# Altium PCB POETIC_AD_Input_V2_Panel.PcbDoc
Units mm, origin at the board's own origin, x right, y up, seen from the top; angles counter-clockwise.
Board outline 420 x 220 mm, 2 copper layers (Top Layer, Bottom Layer); 4 components, 0 nets, 4 pads, 0 vias.
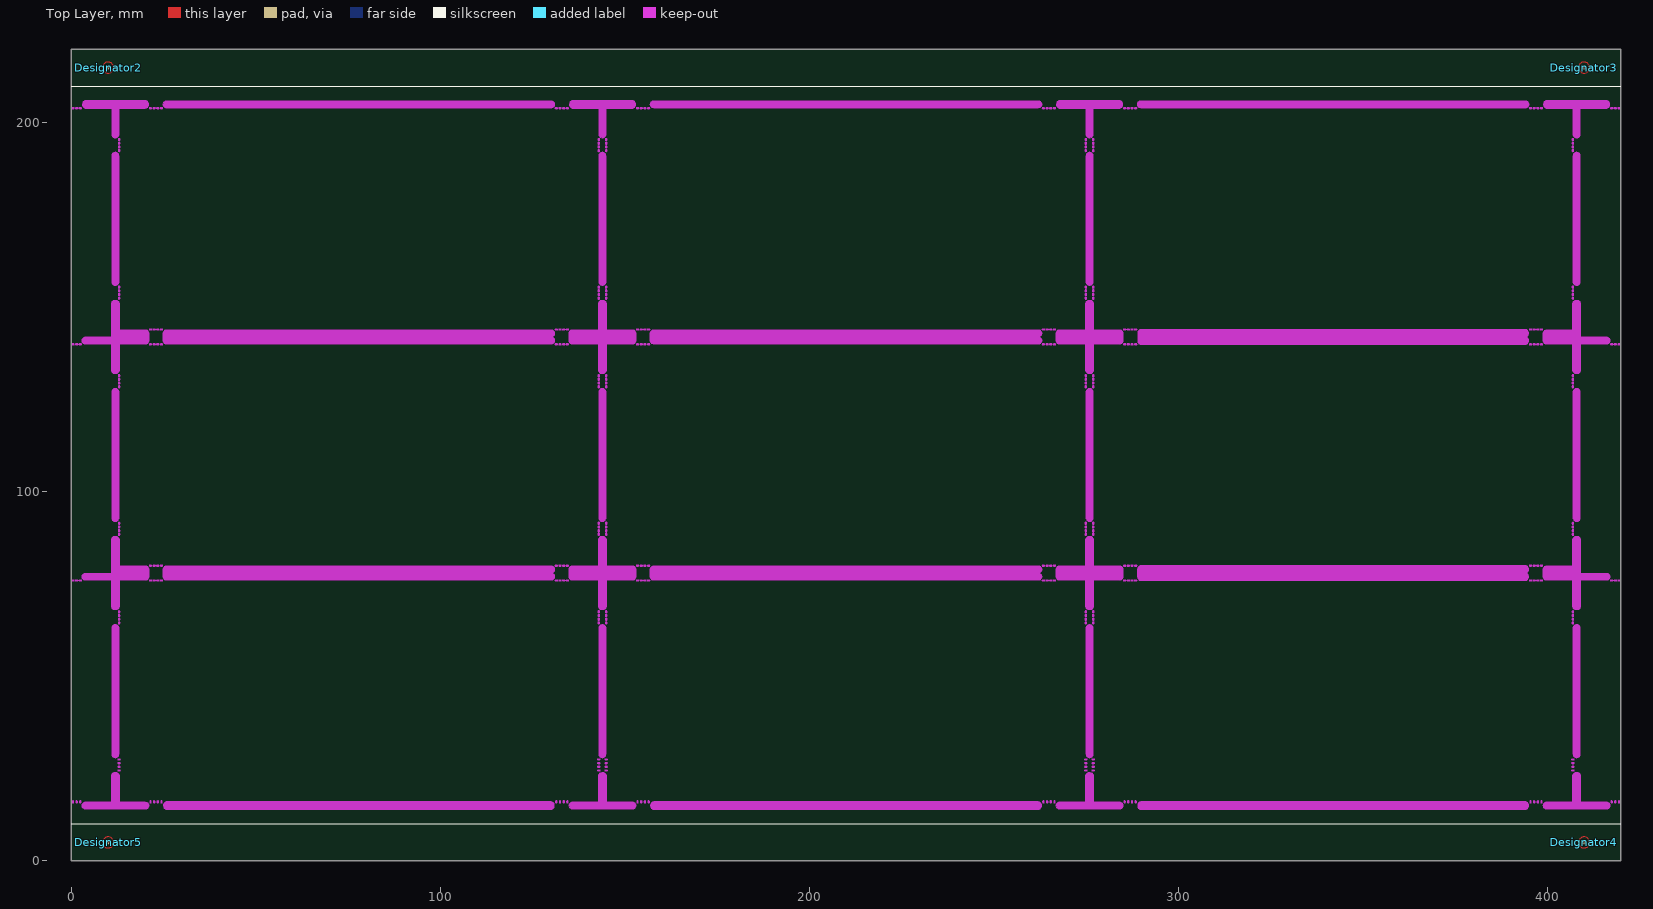
[diagram p0: Top Layer view]
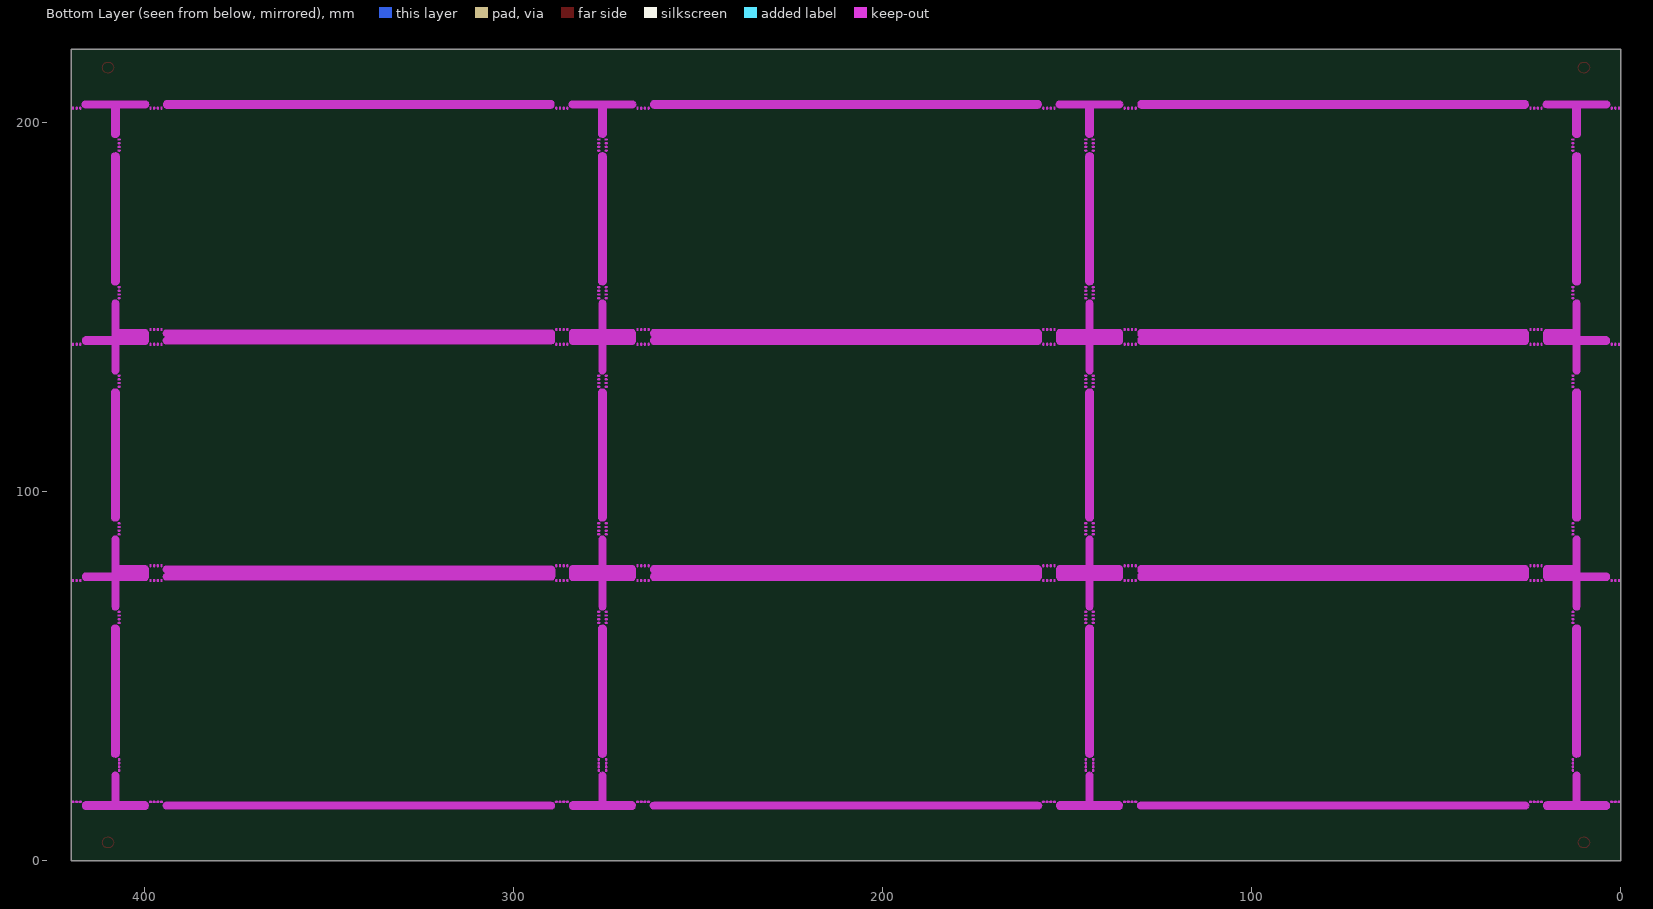
[diagram p1: Bottom Layer view, seen from below]

## Layer stack, top to bottom
Top Solder: solder mask 0.0102, Solder Resist, Dk 3.5
Top Layer: signal copper 0.0356
Dielectric 1: dielectric 0.32, FR-4, Dk 4.8
Bottom Layer: signal copper 0.0356
Bottom Solder: solder mask 0.0102, Solder Resist, Dk 3.5

## Board outline
0,0 0,220 420,220 420,0
cut-out: 4,16 10.999,16 10.999,23 cw(c12,23) 13,23 13,16 20,16 cw(c20,15) 21,15 cw(c20,15) 20,13.999 4,13.999 cw(c4,15)
cut-out: 0.5,16.25 ccw(c0.5,16) 0.5,15.749 ccw(c0.5,16) 0.75,16 ccw(c0.5,16)
cut-out: 1.5,16.25 ccw(c1.5,16) 1.5,15.749 ccw(c1.5,16) 1.75,16 ccw(c1.5,16)
cut-out: 2.5,16.25 ccw(c2.5,16) 2.5,15.749 ccw(c2.5,16) 2.75,16 ccw(c2.5,16)
cut-out: 21.5,16.25 ccw(c21.5,16) 21.5,15.749 ccw(c21.5,16) 21.75,16 ccw(c21.5,16)
cut-out: 22.5,16.25 ccw(c22.5,16) 22.5,15.749 ccw(c22.5,16) 22.75,16 ccw(c22.5,16)
cut-out: 23.5,16.25 ccw(c23.5,16) 23.5,15.749 ccw(c23.5,16) 23.75,16 ccw(c23.5,16)
cut-out: 24.5,16.25 ccw(c24.5,16) 24.5,15.749 ccw(c24.5,16) 24.75,16 ccw(c24.5,16)
cut-out: 26,16 ccw(c26,15) 26,13.999 130,13.999 ccw(c130,15) 131,15 ccw(c130,15) 130,16
cut-out: 131.5,16.25 ccw(c131.5,16) 131.5,15.749 ccw(c131.5,16) 131.75,16 ccw(c131.5,16)
cut-out: 132.5,16.25 ccw(c132.5,16) 132.5,15.749 ccw(c132.5,16) 132.75,16 ccw(c132.5,16)
cut-out: 133.5,16.25 ccw(c133.5,16) 133.5,15.749 ccw(c133.5,16) 133.75,16 ccw(c133.5,16)
cut-out: 134.5,16.25 ccw(c134.5,16) 134.5,15.749 ccw(c134.5,16) 134.75,16 ccw(c134.5,16)
cut-out: 136,16 142.999,16 142.999,23 cw(c144,23) 145,23 145,16 152,16 cw(c152,15) 153,15 cw(c152,15) 152,13.999 136,13.999 cw(c136,15)
cut-out: 153.5,16.25 ccw(c153.5,16) 153.5,15.749 ccw(c153.5,16) 153.75,16 ccw(c153.5,16)
cut-out: 154.5,16.25 ccw(c154.5,16) 154.5,15.749 ccw(c154.5,16) 154.75,16 ccw(c154.5,16)
cut-out: 155.5,16.25 ccw(c155.5,16) 155.5,15.749 ccw(c155.5,16) 155.75,16 ccw(c155.5,16)
cut-out: 156.5,16.25 ccw(c156.5,16) 156.5,15.749 ccw(c156.5,16) 156.75,16 ccw(c156.5,16)
cut-out: 158,16 ccw(c158,15) 158,13.999 262,13.999 ccw(c262,15) 263,15 ccw(c262,15) 262,16
cut-out: 263.5,16.25 ccw(c263.5,16) 263.5,15.749 ccw(c263.5,16) 263.75,16 ccw(c263.5,16)
cut-out: 264.5,16.25 ccw(c264.5,16) 264.5,15.749 ccw(c264.5,16) 264.75,16 ccw(c264.5,16)
cut-out: 265.5,16.25 ccw(c265.5,16) 265.5,15.749 ccw(c265.5,16) 265.75,16 ccw(c265.5,16)
cut-out: 266.5,16.25 ccw(c266.5,16) 266.5,15.749 ccw(c266.5,16) 266.75,16 ccw(c266.5,16)
cut-out: 268,16 274.999,16 274.999,23 cw(c276,23) 277,23 277,16 284,16 cw(c284,15) 285,15 cw(c284,15) 284,13.999 268,13.999 cw(c268,15)
cut-out: 285.5,16.25 ccw(c285.5,16) 285.5,15.749 ccw(c285.5,16) 285.75,16 ccw(c285.5,16)
cut-out: 286.5,16.25 ccw(c286.5,16) 286.5,15.749 ccw(c286.5,16) 286.75,16 ccw(c286.5,16)
cut-out: 287.5,16.25 ccw(c287.5,16) 287.5,15.749 ccw(c287.5,16) 287.75,16 ccw(c287.5,16)
cut-out: 288.5,16.25 ccw(c288.5,16) 288.5,15.749 ccw(c288.5,16) 288.75,16 ccw(c288.5,16)
cut-out: 290,16 ccw(c290,15) 290,13.999 394,13.999 ccw(c394,15) 395,15 ccw(c394,15) 394,16
cut-out: 395.5,16.25 ccw(c395.5,16) 395.5,15.749 ccw(c395.5,16) 395.75,16 ccw(c395.5,16)
cut-out: 396.5,16.25 ccw(c396.5,16) 396.5,15.749 ccw(c396.5,16) 396.75,16 ccw(c396.5,16)
cut-out: 397.5,16.25 ccw(c397.5,16) 397.5,15.749 ccw(c397.5,16) 397.75,16 ccw(c397.5,16)
cut-out: 398.5,16.25 ccw(c398.5,16) 398.5,15.749 ccw(c398.5,16) 398.75,16 ccw(c398.5,16)
cut-out: 400,16 406.999,16 406.999,23 cw(c408,23) 409,23 409,16 416,16 cw(c416,15) 417,15 cw(c416,15) 416,13.999 400,13.999 cw(c400,15)
cut-out: 417.5,16.25 ccw(c417.5,16) 417.5,15.749 ccw(c417.5,16) 417.75,16 ccw(c417.5,16)
cut-out: 418.5,16.25 ccw(c418.5,16) 418.5,15.749 ccw(c418.5,16) 418.75,16 ccw(c418.5,16)
cut-out: 419.5,16.25 ccw(c419.5,16) 419.5,15.749 ccw(c419.5,16) 419.75,16 ccw(c419.5,16)
cut-out: 12.749,24.5 cw(c13,24.5) 13.25,24.5 cw(c13,24.5)
cut-out: 12.749,25.5 cw(c13,25.5) 13.25,25.5 cw(c13,25.5)
cut-out: 12.749,26.5 cw(c13,26.5) 13.25,26.5 cw(c13,26.5)
cut-out: 12.749,27.5 cw(c13,27.5) 13.25,27.5 cw(c13,27.5)
cut-out: 142.749,24.5 cw(c143,24.5) 143.25,24.5 cw(c143,24.5)
cut-out: 142.749,25.5 cw(c143,25.5) 143.25,25.5 cw(c143,25.5)
cut-out: 142.749,26.5 cw(c143,26.5) 143.25,26.5 cw(c143,26.5)
cut-out: 142.749,27.5 cw(c143,27.5) 143.25,27.5 cw(c143,27.5)
cut-out: 144.749,24.5 cw(c145,24.5) 145.25,24.5 cw(c145,24.5)
cut-out: 144.749,25.5 cw(c145,25.5) 145.25,25.5 cw(c145,25.5)
cut-out: 144.749,26.5 cw(c145,26.5) 145.25,26.5 cw(c145,26.5)
cut-out: 144.749,27.5 cw(c145,27.5) 145.25,27.5 cw(c145,27.5)
cut-out: 274.749,24.5 cw(c275,24.5) 275.25,24.5 cw(c275,24.5)
cut-out: 274.749,25.5 cw(c275,25.5) 275.25,25.5 cw(c275,25.5)
cut-out: 274.749,26.5 cw(c275,26.5) 275.25,26.5 cw(c275,26.5)
cut-out: 274.749,27.5 cw(c275,27.5) 275.25,27.5 cw(c275,27.5)
cut-out: 276.749,24.5 cw(c277,24.5) 277.25,24.5 cw(c277,24.5)
cut-out: 276.749,25.5 cw(c277,25.5) 277.25,25.5 cw(c277,25.5)
cut-out: 276.749,26.5 cw(c277,26.5) 277.25,26.5 cw(c277,26.5)
cut-out: 276.749,27.5 cw(c277,27.5) 277.25,27.5 cw(c277,27.5)
cut-out: 406.749,24.5 cw(c407,24.5) 407.25,24.5 cw(c407,24.5)
cut-out: 406.749,25.5 cw(c407,25.5) 407.25,25.5 cw(c407,25.5)
cut-out: 406.749,26.5 cw(c407,26.5) 407.25,26.5 cw(c407,26.5)
cut-out: 406.749,27.5 cw(c407,27.5) 407.25,27.5 cw(c407,27.5)
cut-out: 12.749,91.5 ccw(c13,91.5) 13.25,91.5 ccw(c13,91.5)
cut-out: 12.749,90.5 ccw(c13,90.5) 13.25,90.5 ccw(c13,90.5)
cut-out: 12.749,89.5 ccw(c13,89.5) 13.25,89.5 ccw(c13,89.5)
cut-out: 12.749,88.5 ccw(c13,88.5) 13.25,88.5 ccw(c13,88.5)
cut-out: 21.5,79.749 cw(c21.5,80) 21.5,80.25 cw(c21.5,80) 21.75,80 cw(c21.5,80)
cut-out: 22.5,79.749 cw(c22.5,80) 22.5,80.25 cw(c22.5,80) 22.75,80 cw(c22.5,80)
cut-out: 23.5,79.749 cw(c23.5,80) 23.5,80.25 cw(c23.5,80) 23.75,80 cw(c23.5,80)
cut-out: 24.5,79.749 cw(c24.5,80) 24.5,80.25 cw(c24.5,80) 24.75,80 cw(c24.5,80)
cut-out: 142.749,91.5 ccw(c143,91.5) 143.25,91.5 ccw(c143,91.5)
cut-out: 142.749,90.5 ccw(c143,90.5) 143.25,90.5 ccw(c143,90.5)
cut-out: 142.749,89.5 ccw(c143,89.5) 143.25,89.5 ccw(c143,89.5)
cut-out: 142.749,88.5 ccw(c143,88.5) 143.25,88.5 ccw(c143,88.5)
cut-out: 144.749,91.5 ccw(c145,91.5) 145.25,91.5 ccw(c145,91.5)
cut-out: 144.749,90.5 ccw(c145,90.5) 145.25,90.5 ccw(c145,90.5)
cut-out: 144.749,89.5 ccw(c145,89.5) 145.25,89.5 ccw(c145,89.5)
cut-out: 144.749,88.5 ccw(c145,88.5) 145.25,88.5 ccw(c145,88.5)
cut-out: 134.5,79.749 cw(c134.5,80) 134.5,80.25 cw(c134.5,80) 134.75,80 cw(c134.5,80)
cut-out: 133.5,79.749 cw(c133.5,80) 133.5,80.25 cw(c133.5,80) 133.75,80 cw(c133.5,80)
cut-out: 132.5,79.749 cw(c132.5,80) 132.5,80.25 cw(c132.5,80) 132.75,80 cw(c132.5,80)
cut-out: 131.5,79.749 cw(c131.5,80) 131.5,80.25 cw(c131.5,80) 131.75,80 cw(c131.5,80)
cut-out: 153.5,79.749 cw(c153.5,80) 153.5,80.25 cw(c153.5,80) 153.75,80 cw(c153.5,80)
cut-out: 154.5,79.749 cw(c154.5,80) 154.5,80.25 cw(c154.5,80) 154.75,80 cw(c154.5,80)
cut-out: 155.5,79.749 cw(c155.5,80) 155.5,80.25 cw(c155.5,80) 155.75,80 cw(c155.5,80)
cut-out: 156.5,79.749 cw(c156.5,80) 156.5,80.25 cw(c156.5,80) 156.75,80 cw(c156.5,80)
cut-out: 263.5,79.749 cw(c263.5,80) 263.5,80.25 cw(c263.5,80) 263.75,80 cw(c263.5,80)
cut-out: 264.5,79.749 cw(c264.5,80) 264.5,80.25 cw(c264.5,80) 264.75,80 cw(c264.5,80)
cut-out: 265.5,79.749 cw(c265.5,80) 265.5,80.25 cw(c265.5,80) 265.75,80 cw(c265.5,80)
cut-out: 266.5,79.749 cw(c266.5,80) 266.5,80.25 cw(c266.5,80) 266.75,80 cw(c266.5,80)
cut-out: 274.749,91.5 ccw(c275,91.5) 275.25,91.5 ccw(c275,91.5)
cut-out: 274.749,90.5 ccw(c275,90.5) 275.25,90.5 ccw(c275,90.5)
cut-out: 274.749,89.5 ccw(c275,89.5) 275.25,89.5 ccw(c275,89.5)
cut-out: 274.749,88.5 ccw(c275,88.5) 275.25,88.5 ccw(c275,88.5)
cut-out: 276.749,91.5 ccw(c277,91.5) 277.25,91.5 ccw(c277,91.5)
cut-out: 276.749,90.5 ccw(c277,90.5) 277.25,90.5 ccw(c277,90.5)
cut-out: 276.749,89.5 ccw(c277,89.5) 277.25,89.5 ccw(c277,89.5)
cut-out: 276.749,88.5 ccw(c277,88.5) 277.25,88.5 ccw(c277,88.5)
cut-out: 285.5,79.749 cw(c285.5,80) 285.5,80.25 cw(c285.5,80) 285.75,80 cw(c285.5,80)
cut-out: 286.5,79.749 cw(c286.5,80) 286.5,80.25 cw(c286.5,80) 286.75,80 cw(c286.5,80)
cut-out: 287.5,79.749 cw(c287.5,80) 287.5,80.25 cw(c287.5,80) 287.75,80 cw(c287.5,80)
cut-out: 288.5,79.749 cw(c288.5,80) 288.5,80.25 cw(c288.5,80) 288.75,80 cw(c288.5,80)
cut-out: 406.749,91.5 ccw(c407,91.5) 407.25,91.5 ccw(c407,91.5)
cut-out: 406.749,90.5 ccw(c407,90.5) 407.25,90.5 ccw(c407,90.5)
cut-out: 406.749,89.5 ccw(c407,89.5) 407.25,89.5 ccw(c407,89.5)
cut-out: 406.749,88.5 ccw(c407,88.5) 407.25,88.5 ccw(c407,88.5)
cut-out: 398.5,79.749 cw(c398.5,80) 398.5,80.25 cw(c398.5,80) 398.75,80 cw(c398.5,80)
cut-out: 397.5,79.749 cw(c397.5,80) 397.5,80.25 cw(c397.5,80) 397.75,80 cw(c397.5,80)
cut-out: 396.5,79.749 cw(c396.5,80) 396.5,80.25 cw(c396.5,80) 396.75,80 cw(c396.5,80)
cut-out: 395.5,79.749 cw(c395.5,80) 395.5,80.25 cw(c395.5,80) 395.75,80 cw(c395.5,80)
cut-out: 406.749,64.5 ccw(c406.999,64.5) 407.25,64.5 ccw(c406.999,64.5)
cut-out: 406.749,65.5 ccw(c406.999,65.5) 407.25,65.5 ccw(c406.999,65.5)
cut-out: 406.749,66.5 ccw(c406.999,66.5) 407.25,66.5 ccw(c406.999,66.5)
cut-out: 406.749,67.5 ccw(c406.999,67.5) 407.25,67.5 ccw(c406.999,67.5)
cut-out: 276.749,64.5 ccw(c276.999,64.5) 277.25,64.5 ccw(c276.999,64.5)
cut-out: 276.749,65.5 ccw(c276.999,65.5) 277.25,65.5 ccw(c276.999,65.5)
cut-out: 276.749,66.5 ccw(c276.999,66.5) 277.25,66.5 ccw(c276.999,66.5)
cut-out: 276.749,67.5 ccw(c276.999,67.5) 277.25,67.5 ccw(c276.999,67.5)
cut-out: 274.749,64.5 ccw(c274.999,64.5) 275.25,64.5 ccw(c274.999,64.5)
cut-out: 274.749,65.5 ccw(c274.999,65.5) 275.25,65.5 ccw(c274.999,65.5)
cut-out: 274.749,66.5 ccw(c274.999,66.5) 275.25,66.5 ccw(c274.999,66.5)
cut-out: 274.749,67.5 ccw(c274.999,67.5) 275.25,67.5 ccw(c274.999,67.5)
cut-out: 144.749,64.5 ccw(c144.999,64.5) 145.25,64.5 ccw(c144.999,64.5)
cut-out: 144.749,65.5 ccw(c144.999,65.5) 145.25,65.5 ccw(c144.999,65.5)
cut-out: 144.749,66.5 ccw(c144.999,66.5) 145.25,66.5 ccw(c144.999,66.5)
cut-out: 144.749,67.5 ccw(c144.999,67.5) 145.25,67.5 ccw(c144.999,67.5)
cut-out: 142.749,64.5 ccw(c142.999,64.5) 143.25,64.5 ccw(c142.999,64.5)
cut-out: 142.749,65.5 ccw(c142.999,65.5) 143.25,65.5 ccw(c142.999,65.5)
cut-out: 142.749,66.5 ccw(c142.999,66.5) 143.25,66.5 ccw(c142.999,66.5)
cut-out: 142.749,67.5 ccw(c142.999,67.5) 143.25,67.5 ccw(c142.999,67.5)
cut-out: 12.749,64.5 ccw(c12.999,64.5) 13.25,64.5 ccw(c12.999,64.5)
cut-out: 12.749,65.5 ccw(c12.999,65.5) 13.25,65.5 ccw(c12.999,65.5)
cut-out: 12.749,66.5 ccw(c12.999,66.5) 13.25,66.5 ccw(c12.999,66.5)
cut-out: 12.749,67.5 ccw(c12.999,67.5) 13.25,67.5 ccw(c12.999,67.5)
cut-out: 419.499,75.75 cw(c419.499,76) 419.499,76.25 cw(c419.499,76) 419.75,76 cw(c419.499,76)
cut-out: 418.499,75.75 cw(c418.499,76) 418.499,76.25 cw(c418.499,76) 418.75,76 cw(c418.499,76)
cut-out: 417.499,75.75 cw(c417.499,76) 417.499,76.25 cw(c417.499,76) 417.75,76 cw(c417.499,76)
cut-out: 398.499,75.75 cw(c398.499,76) 398.499,76.25 cw(c398.499,76) 398.75,76 cw(c398.499,76)
cut-out: 397.499,75.75 cw(c397.499,76) 397.499,76.25 cw(c397.499,76) 397.75,76 cw(c397.499,76)
cut-out: 396.499,75.75 cw(c396.499,76) 396.499,76.25 cw(c396.499,76) 396.75,76 cw(c396.499,76)
cut-out: 395.499,75.75 cw(c395.499,76) 395.499,76.25 cw(c395.499,76) 395.75,76 cw(c395.499,76)
cut-out: 288.499,75.75 cw(c288.499,76) 288.499,76.25 cw(c288.499,76) 288.75,76 cw(c288.499,76)
cut-out: 287.499,75.75 cw(c287.499,76) 287.499,76.25 cw(c287.499,76) 287.75,76 cw(c287.499,76)
cut-out: 286.499,75.75 cw(c286.499,76) 286.499,76.25 cw(c286.499,76) 286.75,76 cw(c286.499,76)
cut-out: 285.499,75.75 cw(c285.499,76) 285.499,76.25 cw(c285.499,76) 285.75,76 cw(c285.499,76)
cut-out: 266.499,75.75 cw(c266.499,76) 266.499,76.25 cw(c266.499,76) 266.75,76 cw(c266.499,76)
cut-out: 265.499,75.75 cw(c265.499,76) 265.499,76.25 cw(c265.499,76) 265.75,76 cw(c265.499,76)
cut-out: 264.499,75.75 cw(c264.499,76) 264.499,76.25 cw(c264.499,76) 264.75,76 cw(c264.499,76)
cut-out: 263.499,75.75 cw(c263.499,76) 263.499,76.25 cw(c263.499,76) 263.75,76 cw(c263.499,76)
cut-out: 156.499,75.75 cw(c156.499,76) 156.499,76.25 cw(c156.499,76) 156.75,76 cw(c156.499,76)
cut-out: 155.499,75.75 cw(c155.499,76) 155.499,76.25 cw(c155.499,76) 155.75,76 cw(c155.499,76)
cut-out: 154.499,75.75 cw(c154.499,76) 154.499,76.25 cw(c154.499,76) 154.75,76 cw(c154.499,76)
cut-out: 153.499,75.75 cw(c153.499,76) 153.499,76.25 cw(c153.499,76) 153.75,76 cw(c153.499,76)
cut-out: 134.499,75.75 cw(c134.499,76) 134.499,76.25 cw(c134.499,76) 134.75,76 cw(c134.499,76)
cut-out: 133.499,75.75 cw(c133.499,76) 133.499,76.25 cw(c133.499,76) 133.75,76 cw(c133.499,76)
cut-out: 132.499,75.75 cw(c132.499,76) 132.499,76.25 cw(c132.499,76) 132.75,76 cw(c132.499,76)
cut-out: 131.499,75.75 cw(c131.499,76) 131.499,76.25 cw(c131.499,76) 131.75,76 cw(c131.499,76)
cut-out: 24.499,75.75 cw(c24.499,76) 24.499,76.25 cw(c24.499,76) 24.75,76 cw(c24.499,76)
cut-out: 23.499,75.75 cw(c23.499,76) 23.499,76.25 cw(c23.499,76) 23.75,76 cw(c23.499,76)
cut-out: 22.499,75.75 cw(c22.499,76) 22.499,76.25 cw(c22.499,76) 22.75,76 cw(c22.499,76)
cut-out: 21.499,75.75 cw(c21.499,76) 21.499,76.25 cw(c21.499,76) 21.75,76 cw(c21.499,76)
cut-out: 2.499,75.75 cw(c2.499,76) 2.499,76.25 cw(c2.499,76) 2.75,76 cw(c2.499,76)
cut-out: 1.499,75.75 cw(c1.499,76) 1.499,76.25 cw(c1.499,76) 1.75,76 cw(c1.499,76)
cut-out: 0.499,75.75 cw(c0.499,76) 0.499,76.25 cw(c0.499,76) 0.75,76 cw(c0.499,76)
cut-out: 406.999,69 406.999,76 400.019,76 cw(c399.999,77) 398.999,77 398.999,78.999 cw(c399.999,78.999) 399.576,79.906 cw(c400,79) 400,80 406.999,80 406.999,87 cw(c408,87) 409,87 409,79 cw(c408,79) 409,78.999 409,78 415.999,78 cw(c415.999,77) 417,77 cw(c415.999,77) 415.999,76 409,76 409,69 cw(c407.999,69)
cut-out: 142.999,69 142.999,76 136.02,76 cw(c136,77) 135.538,76.112 cw(c135.999,77) 134.999,77.028 134.999,79 cw(c136,79) 136,80 142.999,80 142.999,87 cw(c144,87) 145,87 145,80 152,80 cw(c152,79) 153,79 cw(c152,79) 153,78.971 153,77 cw(c151.999,77) 151.979,76 145,76 145,69 cw(c143.999,69)
cut-out: 10.999,69 10.999,76 3.999,76 cw(c3.999,77) 3.999,78 10.999,78 10.999,78.999 cw(c12,78.999) 10.999,79.002 10.999,87 cw(c12,87) 13,87 13,80 20,80 cw(c20,79) 21,79 cw(c20,79) 21,78.971 21,77 cw(c19.999,77) 19.993,76 13,76 13,69 cw(c11.999,69)
cut-out: 274.999,69 274.999,76 268.019,76 cw(c267.999,77) 266.999,77 266.999,78.999 cw(c267.999,78.999) 267.576,79.906 cw(c268,79) 268,80 274.999,80 274.999,87 cw(c276,87) 277,87 277,80 284,80 cw(c284,79) 285,79 cw(c284,79) 285,78.993 285,77 cw(c284,77) 283.98,76 277,76 277,69 cw(c275.999,69)
cut-out: 288.999,77.028 ccw(c289.999,77) 289.538,76.112 ccw(c290,77) 290.02,76 393.999,76 ccw(c393.999,77) 395,77 ccw(c393.999,77) 394.033,78 ccw(c394,79) 395,79 ccw(c394,79) 394,80 290,80 ccw(c290,79) 288.999,79 ccw(c290,79) 288.999,79
cut-out: 156.999,77 156.999,78.999 cw(c157.999,78.999) 157.576,79.906 cw(c158,79) 158,80 262,80 cw(c262,79) 263,79 cw(c262,79) 262.033,78 cw(c261.999,77) 263,77 cw(c261.999,77) 261.999,76 158.019,76 cw(c157.999,77)
cut-out: 24.999,77 24.999,78.999 cw(c25.999,78.999) 25.576,79.906 cw(c26,79) 26,80 130,80 cw(c130,79) 131,79 cw(c130,79) 130.033,78 cw(c129.999,77) 131,77 cw(c129.999,77) 129.999,76 26.019,76 cw(c25.999,77)
cut-out: 24.999,141 24.999,143 cw(c26,143) 25.576,143.906 cw(c26,143) 26,144 130,144 cw(c130,143) 131,143 cw(c130,143) 130.034,142 cw(c130,141) 131,141 cw(c130,141) 130,140 26.02,140 cw(c26,141)
cut-out: 156.999,141 156.999,143 cw(c158,143) 157.576,143.906 cw(c158,143) 158,144 262,144 cw(c262,143) 263,143 cw(c262,143) 262.034,142 cw(c262,141) 263,141 cw(c262,141) 262,140 158.02,140 cw(c158,141)
cut-out: 289,141.028 ccw(c290,141) 289.538,140.113 ccw(c290,141) 290.02,140 394,140 ccw(c394,141) 395,141 ccw(c394,141) 394.034,142 ccw(c394,143) 395,143 ccw(c394,143) 394,144 290,144 ccw(c290,143) 289,143 ccw(c290,143) 289,143
cut-out: 274.999,133 274.999,140 268.02,140 cw(c268,141) 266.999,141 266.999,143 cw(c268,143) 267.576,143.906 cw(c268,143) 268,144 275,144 275,151 cw(c276,151) 277,151 277,144 284,144 cw(c284,143) 285,143 cw(c284,143) 285,142.994 285,141 cw(c284,141) 283.98,140 277,140 277,133 cw(c276,133)
cut-out: 10.999,133 10.999,140 4,140 cw(c4,141) 4,142.001 11,142.001 11,143 cw(c12,143) 11,143.002 11,151 cw(c12,151) 13,151 13,144 20,144 cw(c20,143) 21,143 cw(c20,143) 21,142.972 21,141 cw(c20,141) 19.993,140 13,140 13,133 cw(c12,133)
cut-out: 142.999,133 142.999,140 136.02,140 cw(c136,141) 135.538,140.113 cw(c136,141) 135,141.028 135,143 cw(c136,143) 136,144 143,144 143,151 cw(c144,151) 145,151 145,144 152,144 cw(c152,143) 153,143 cw(c152,143) 153,142.971 153,141 cw(c152,141) 151.98,140 145,140 145,133 cw(c144,133)
cut-out: 406.999,133 406.999,140 400.02,140 cw(c400,141) 398.999,141 398.999,143 cw(c400,143) 399.576,143.906 cw(c400,143) 400,144 407,144 407,151 cw(c408,151) 409,151 409,143 cw(c408,143) 409,143 409,142.001 416,142.001 cw(c416,141) 417,141 cw(c416,141) 416,140 409,140 409,133 cw(c408,133)
cut-out: 10.999,29 ccw(c12,29) 13,29 13,63 ccw(c12,63) 10.999,63
cut-out: 142.999,29 ccw(c144,29) 145,29 145,63 ccw(c144,63) 142.999,63
cut-out: 274.999,29 ccw(c276,29) 277,29 277,63 ccw(c276,63) 274.999,63
cut-out: 406.999,29 ccw(c408,29) 409,29 409,63 ccw(c408,63) 406.999,63
cut-out: 0.5,139.75 cw(c0.5,140) 0.5,140.251 cw(c0.5,140) 0.75,140 cw(c0.5,140)
cut-out: 1.5,139.75 cw(c1.5,140) 1.5,140.251 cw(c1.5,140) 1.75,140 cw(c1.5,140)
cut-out: 2.5,139.75 cw(c2.5,140) 2.5,140.251 cw(c2.5,140) 2.75,140 cw(c2.5,140)
cut-out: 21.5,139.75 cw(c21.5,140) 21.5,140.251 cw(c21.5,140) 21.75,140 cw(c21.5,140)
cut-out: 22.5,139.75 cw(c22.5,140) 22.5,140.251 cw(c22.5,140) 22.75,140 cw(c22.5,140)
cut-out: 23.5,139.75 cw(c23.5,140) 23.5,140.251 cw(c23.5,140) 23.75,140 cw(c23.5,140)
cut-out: 24.5,139.75 cw(c24.5,140) 24.5,140.251 cw(c24.5,140) 24.75,140 cw(c24.5,140)
cut-out: 131.5,139.75 cw(c131.5,140) 131.5,140.251 cw(c131.5,140) 131.75,140 cw(c131.5,140)
cut-out: 132.5,139.75 cw(c132.5,140) 132.5,140.251 cw(c132.5,140) 132.75,140 cw(c132.5,140)
cut-out: 133.5,139.75 cw(c133.5,140) 133.5,140.251 cw(c133.5,140) 133.75,140 cw(c133.5,140)
cut-out: 134.5,139.75 cw(c134.5,140) 134.5,140.251 cw(c134.5,140) 134.75,140 cw(c134.5,140)
cut-out: 153.5,139.75 cw(c153.5,140) 153.5,140.251 cw(c153.5,140) 153.75,140 cw(c153.5,140)
cut-out: 154.5,139.75 cw(c154.5,140) 154.5,140.251 cw(c154.5,140) 154.75,140 cw(c154.5,140)
cut-out: 155.5,139.75 cw(c155.5,140) 155.5,140.251 cw(c155.5,140) 155.75,140 cw(c155.5,140)
cut-out: 156.5,139.75 cw(c156.5,140) 156.5,140.251 cw(c156.5,140) 156.75,140 cw(c156.5,140)
cut-out: 263.5,139.75 cw(c263.5,140) 263.5,140.251 cw(c263.5,140) 263.75,140 cw(c263.5,140)
cut-out: 264.5,139.75 cw(c264.5,140) 264.5,140.251 cw(c264.5,140) 264.75,140 cw(c264.5,140)
cut-out: 265.5,139.75 cw(c265.5,140) 265.5,140.251 cw(c265.5,140) 265.75,140 cw(c265.5,140)
cut-out: 266.5,139.75 cw(c266.5,140) 266.5,140.251 cw(c266.5,140) 266.75,140 cw(c266.5,140)
cut-out: 285.5,139.75 cw(c285.5,140) 285.5,140.251 cw(c285.5,140) 285.75,140 cw(c285.5,140)
cut-out: 286.5,139.75 cw(c286.5,140) 286.5,140.251 cw(c286.5,140) 286.75,140 cw(c286.5,140)
cut-out: 287.5,139.75 cw(c287.5,140) 287.5,140.251 cw(c287.5,140) 287.75,140 cw(c287.5,140)
cut-out: 288.5,139.75 cw(c288.5,140) 288.5,140.251 cw(c288.5,140) 288.75,140 cw(c288.5,140)
cut-out: 395.5,139.75 cw(c395.5,140) 395.5,140.251 cw(c395.5,140) 395.75,140 cw(c395.5,140)
cut-out: 396.5,139.75 cw(c396.5,140) 396.5,140.251 cw(c396.5,140) 396.75,140 cw(c396.5,140)
cut-out: 397.5,139.75 cw(c397.5,140) 397.5,140.251 cw(c397.5,140) 397.75,140 cw(c397.5,140)
cut-out: 398.5,139.75 cw(c398.5,140) 398.5,140.251 cw(c398.5,140) 398.75,140 cw(c398.5,140)
cut-out: 417.5,139.75 cw(c417.5,140) 417.5,140.251 cw(c417.5,140) 417.75,140 cw(c417.5,140)
cut-out: 418.5,139.75 cw(c418.5,140) 418.5,140.251 cw(c418.5,140) 418.75,140 cw(c418.5,140)
cut-out: 419.5,139.75 cw(c419.5,140) 419.5,140.251 cw(c419.5,140) 419.75,140 cw(c419.5,140)
cut-out: 10.999,93 ccw(c12,93) 13,93 13,127 ccw(c12,127) 10.999,127
cut-out: 12.749,131.5 ccw(c13,131.5) 13.25,131.5 ccw(c13,131.5)
cut-out: 12.749,130.5 ccw(c13,130.5) 13.25,130.5 ccw(c13,130.5)
cut-out: 12.749,129.5 ccw(c13,129.5) 13.25,129.5 ccw(c13,129.5)
cut-out: 12.749,128.5 ccw(c13,128.5) 13.25,128.5 ccw(c13,128.5)
cut-out: 142.749,131.5 ccw(c143,131.5) 143.25,131.5 ccw(c143,131.5)
cut-out: 142.749,130.5 ccw(c143,130.5) 143.25,130.5 ccw(c143,130.5)
cut-out: 142.749,129.5 ccw(c143,129.5) 143.25,129.5 ccw(c143,129.5)
cut-out: 142.749,128.5 ccw(c143,128.5) 143.25,128.5 ccw(c143,128.5)
cut-out: 144.749,131.5 ccw(c145,131.5) 145.25,131.5 ccw(c145,131.5)
cut-out: 144.749,130.5 ccw(c145,130.5) 145.25,130.5 ccw(c145,130.5)
cut-out: 144.749,129.5 ccw(c145,129.5) 145.25,129.5 ccw(c145,129.5)
cut-out: 144.749,128.5 ccw(c145,128.5) 145.25,128.5 ccw(c145,128.5)
cut-out: 142.999,93 ccw(c144,93) 145,93 145,127 ccw(c144,127) 142.999,127
cut-out: 274.999,93 ccw(c276,93) 277,93 277,127 ccw(c276,127) 274.999,127
cut-out: 274.749,131.5 ccw(c275,131.5) 275.25,131.5 ccw(c275,131.5)
cut-out: 274.749,130.5 ccw(c275,130.5) 275.25,130.5 ccw(c275,130.5)
cut-out: 274.749,129.5 ccw(c275,129.5) 275.25,129.5 ccw(c275,129.5)
cut-out: 274.749,128.5 ccw(c275,128.5) 275.25,128.5 ccw(c275,128.5)
cut-out: 276.749,131.5 ccw(c277,131.5) 277.25,131.5 ccw(c277,131.5)
cut-out: 276.749,130.5 ccw(c277,130.5) 277.25,130.5 ccw(c277,130.5)
cut-out: 276.749,129.5 ccw(c277,129.5) 277.25,129.5 ccw(c277,129.5)
cut-out: 276.749,128.5 ccw(c277,128.5) 277.25,128.5 ccw(c277,128.5)
cut-out: 406.749,131.5 ccw(c407,131.5) 407.25,131.5 ccw(c407,131.5)
cut-out: 406.749,130.5 ccw(c407,130.5) 407.25,130.5 ccw(c407,130.5)
cut-out: 406.749,129.5 ccw(c407,129.5) 407.25,129.5 ccw(c407,129.5)
cut-out: 406.749,128.5 ccw(c407,128.5) 407.25,128.5 ccw(c407,128.5)
cut-out: 406.999,93 ccw(c408,93) 409,93 409,127 ccw(c408,127) 406.999,127
cut-out: 395.5,143.75 cw(c395.5,144) 395.5,144.25 cw(c395.5,144) 395.75,144 cw(c395.5,144)
cut-out: 396.5,143.75 cw(c396.5,144) 396.5,144.25 cw(c396.5,144) 396.75,144 cw(c396.5,144)
cut-out: 397.5,143.75 cw(c397.5,144) 397.5,144.25 cw(c397.5,144) 397.75,144 cw(c397.5,144)
cut-out: 398.5,143.75 cw(c398.5,144) 398.5,144.25 cw(c398.5,144) 398.75,144 cw(c398.5,144)
cut-out: 406.75,152.5 ccw(c407,152.5) 407.25,152.5 ccw(c407,152.5)
cut-out: 406.75,153.5 ccw(c407,153.5) 407.25,153.5 ccw(c407,153.5)
cut-out: 406.75,154.5 ccw(c407,154.5) 407.25,154.5 ccw(c407,154.5)
cut-out: 406.75,155.5 ccw(c407,155.5) 407.25,155.5 ccw(c407,155.5)
cut-out: 407,157 ccw(c408,157) 409,157 409,191 ccw(c408,191) 407,191
cut-out: 406.75,192.5 ccw(c407,192.5) 407.25,192.5 ccw(c407,192.5)
cut-out: 406.75,193.5 ccw(c407,193.5) 407.25,193.5 ccw(c407,193.5)
cut-out: 406.75,194.5 ccw(c407,194.5) 407.25,194.5 ccw(c407,194.5)
cut-out: 406.75,195.5 ccw(c407,195.5) 407.25,195.5 ccw(c407,195.5)
cut-out: 288.5,143.75 cw(c288.5,144) 288.5,144.25 cw(c288.5,144) 288.75,144 cw(c288.5,144)
cut-out: 287.5,143.75 cw(c287.5,144) 287.5,144.25 cw(c287.5,144) 287.75,144 cw(c287.5,144)
cut-out: 286.5,143.75 cw(c286.5,144) 286.5,144.25 cw(c286.5,144) 286.75,144 cw(c286.5,144)
cut-out: 285.5,143.75 cw(c285.5,144) 285.5,144.25 cw(c285.5,144) 285.75,144 cw(c285.5,144)
cut-out: 276.75,152.5 ccw(c277,152.5) 277.25,152.5 ccw(c277,152.5)
cut-out: 276.75,153.5 ccw(c277,153.5) 277.25,153.5 ccw(c277,153.5)
cut-out: 276.75,154.5 ccw(c277,154.5) 277.25,154.5 ccw(c277,154.5)
cut-out: 276.75,155.5 ccw(c277,155.5) 277.25,155.5 ccw(c277,155.5)
cut-out: 274.75,152.5 ccw(c275,152.5) 275.25,152.5 ccw(c275,152.5)
cut-out: 274.75,153.5 ccw(c275,153.5) 275.25,153.5 ccw(c275,153.5)
cut-out: 274.75,154.5 ccw(c275,154.5) 275.25,154.5 ccw(c275,154.5)
cut-out: 274.75,155.5 ccw(c275,155.5) 275.25,155.5 ccw(c275,155.5)
cut-out: 276.75,192.5 ccw(c277,192.5) 277.25,192.5 ccw(c277,192.5)
cut-out: 276.75,193.5 ccw(c277,193.5) 277.25,193.5 ccw(c277,193.5)
cut-out: 276.75,194.5 ccw(c277,194.5) 277.25,194.5 ccw(c277,194.5)
cut-out: 276.75,195.5 ccw(c277,195.5) 277.25,195.5 ccw(c277,195.5)
cut-out: 274.75,192.5 ccw(c275,192.5) 275.25,192.5 ccw(c275,192.5)
cut-out: 274.75,193.5 ccw(c275,193.5) 275.25,193.5 ccw(c275,193.5)
cut-out: 274.75,194.5 ccw(c275,194.5) 275.25,194.5 ccw(c275,194.5)
cut-out: 274.75,195.5 ccw(c275,195.5) 275.25,195.5 ccw(c275,195.5)
cut-out: 275,157 ccw(c276,157) 277,157 277,191 ccw(c276,191) 275,191
cut-out: 266.5,143.75 cw(c266.5,144) 266.5,144.25 cw(c266.5,144) 266.75,144 cw(c266.5,144)
cut-out: 265.5,143.75 cw(c265.5,144) 265.5,144.25 cw(c265.5,144) 265.75,144 cw(c265.5,144)
cut-out: 264.5,143.75 cw(c264.5,144) 264.5,144.25 cw(c264.5,144) 264.75,144 cw(c264.5,144)
cut-out: 263.5,143.75 cw(c263.5,144) 263.5,144.25 cw(c263.5,144) 263.75,144 cw(c263.5,144)
cut-out: 156.5,143.75 cw(c156.5,144) 156.5,144.25 cw(c156.5,144) 156.75,144 cw(c156.5,144)
cut-out: 155.5,143.75 cw(c155.5,144) 155.5,144.25 cw(c155.5,144) 155.75,144 cw(c155.5,144)
cut-out: 154.5,143.75 cw(c154.5,144) 154.5,144.25 cw(c154.5,144) 154.75,144 cw(c154.5,144)
cut-out: 153.5,143.75 cw(c153.5,144) 153.5,144.25 cw(c153.5,144) 153.75,144 cw(c153.5,144)
cut-out: 131.5,143.75 cw(c131.5,144) 131.5,144.25 cw(c131.5,144) 131.75,144 cw(c131.5,144)
cut-out: 132.5,143.75 cw(c132.5,144) 132.5,144.25 cw(c132.5,144) 132.75,144 cw(c132.5,144)
cut-out: 133.5,143.75 cw(c133.5,144) 133.5,144.25 cw(c133.5,144) 133.75,144 cw(c133.5,144)
cut-out: 134.5,143.75 cw(c134.5,144) 134.5,144.25 cw(c134.5,144) 134.75,144 cw(c134.5,144)
cut-out: 144.75,152.5 ccw(c145,152.5) 145.25,152.5 ccw(c145,152.5)
cut-out: 144.75,153.5 ccw(c145,153.5) 145.25,153.5 ccw(c145,153.5)
cut-out: 144.75,154.5 ccw(c145,154.5) 145.25,154.5 ccw(c145,154.5)
cut-out: 144.75,155.5 ccw(c145,155.5) 145.25,155.5 ccw(c145,155.5)
cut-out: 142.75,152.5 ccw(c143,152.5) 143.25,152.5 ccw(c143,152.5)
cut-out: 142.75,153.5 ccw(c143,153.5) 143.25,153.5 ccw(c143,153.5)
cut-out: 142.75,154.5 ccw(c143,154.5) 143.25,154.5 ccw(c143,154.5)
cut-out: 142.75,155.5 ccw(c143,155.5) 143.25,155.5 ccw(c143,155.5)
cut-out: 143,157 ccw(c144,157) 145,157 145,191 ccw(c144,191) 143,191
cut-out: 144.75,192.5 ccw(c145,192.5) 145.25,192.5 ccw(c145,192.5)
cut-out: 144.75,193.5 ccw(c145,193.5) 145.25,193.5 ccw(c145,193.5)
cut-out: 144.75,194.5 ccw(c145,194.5) 145.25,194.5 ccw(c145,194.5)
cut-out: 144.75,195.5 ccw(c145,195.5) 145.25,195.5 ccw(c145,195.5)
cut-out: 142.75,192.5 ccw(c143,192.5) 143.25,192.5 ccw(c143,192.5)
cut-out: 142.75,193.5 ccw(c143,193.5) 143.25,193.5 ccw(c143,193.5)
cut-out: 142.75,194.5 ccw(c143,194.5) 143.25,194.5 ccw(c143,194.5)
cut-out: 142.75,195.5 ccw(c143,195.5) 143.25,195.5 ccw(c143,195.5)
cut-out: 24.5,143.75 cw(c24.5,144) 24.5,144.25 cw(c24.5,144) 24.75,144 cw(c24.5,144)
cut-out: 23.5,143.75 cw(c23.5,144) 23.5,144.25 cw(c23.5,144) 23.75,144 cw(c23.5,144)
cut-out: 22.5,143.75 cw(c22.5,144) 22.5,144.25 cw(c22.5,144) 22.75,144 cw(c22.5,144)
cut-out: 21.5,143.75 cw(c21.5,144) 21.5,144.25 cw(c21.5,144) 21.75,144 cw(c21.5,144)
cut-out: 12.75,152.5 ccw(c13,152.5) 13.25,152.5 ccw(c13,152.5)
cut-out: 12.75,153.5 ccw(c13,153.5) 13.25,153.5 ccw(c13,153.5)
cut-out: 12.75,154.5 ccw(c13,154.5) 13.25,154.5 ccw(c13,154.5)
cut-out: 12.75,155.5 ccw(c13,155.5) 13.25,155.5 ccw(c13,155.5)
cut-out: 12.75,192.5 ccw(c13,192.5) 13.25,192.5 ccw(c13,192.5)
cut-out: 12.75,193.5 ccw(c13,193.5) 13.25,193.5 ccw(c13,193.5)
cut-out: 12.75,194.5 ccw(c13,194.5) 13.25,194.5 ccw(c13,194.5)
cut-out: 12.75,195.5 ccw(c13,195.5) 13.25,195.5 ccw(c13,195.5)
cut-out: 11,157 ccw(c12,157) 13,157 13,191 ccw(c12,191) 11,191
cut-out: 419.5,203.75 cw(c419.5,204) 419.5,204.25 cw(c419.5,204) 419.75,204 cw(c419.5,204)
cut-out: 418.5,203.75 cw(c418.5,204) 418.5,204.25 cw(c418.5,204) 418.75,204 cw(c418.5,204)
cut-out: 417.5,203.75 cw(c417.5,204) 417.5,204.25 cw(c417.5,204) 417.75,204 cw(c417.5,204)
cut-out: 400,204 407,204 407,197 ccw(c408,197) 409,197 409,204 416,204 ccw(c416,205) 417,205 ccw(c416,205) 416,206 400,206 ccw(c400,205)
cut-out: 398.5,203.75 cw(c398.5,204) 398.5,204.25 cw(c398.5,204) 398.75,204 cw(c398.5,204)
cut-out: 397.5,203.75 cw(c397.5,204) 397.5,204.25 cw(c397.5,204) 397.75,204 cw(c397.5,204)
cut-out: 396.5,203.75 cw(c396.5,204) 396.5,204.25 cw(c396.5,204) 396.75,204 cw(c396.5,204)
cut-out: 395.5,203.75 cw(c395.5,204) 395.5,204.25 cw(c395.5,204) 395.75,204 cw(c395.5,204)
cut-out: 290,204 cw(c290,205) 290,206 394,206 cw(c394,205) 395,205 cw(c394,205) 394,204
cut-out: 288.5,203.75 cw(c288.5,204) 288.5,204.25 cw(c288.5,204) 288.75,204 cw(c288.5,204)
cut-out: 287.5,203.75 cw(c287.5,204) 287.5,204.25 cw(c287.5,204) 287.75,204 cw(c287.5,204)
cut-out: 286.5,203.75 cw(c286.5,204) 286.5,204.25 cw(c286.5,204) 286.75,204 cw(c286.5,204)
cut-out: 285.5,203.75 cw(c285.5,204) 285.5,204.25 cw(c285.5,204) 285.75,204 cw(c285.5,204)
cut-out: 268,204 275,204 275,197 ccw(c276,197) 277,197 277,204 284,204 ccw(c284,205) 285,205 ccw(c284,205) 284,206 268,206 ccw(c268,205)
cut-out: 266.5,203.75 cw(c266.5,204) 266.5,204.25 cw(c266.5,204) 266.75,204 cw(c266.5,204)
cut-out: 265.5,203.75 cw(c265.5,204) 265.5,204.25 cw(c265.5,204) 265.75,204 cw(c265.5,204)
cut-out: 264.5,203.75 cw(c264.5,204) 264.5,204.25 cw(c264.5,204) 264.75,204 cw(c264.5,204)
cut-out: 263.5,203.75 cw(c263.5,204) 263.5,204.25 cw(c263.5,204) 263.75,204 cw(c263.5,204)
cut-out: 158,204 cw(c158,205) 158,206 262,206 cw(c262,205) 263,205 cw(c262,205) 262,204
cut-out: 156.5,203.75 cw(c156.5,204) 156.5,204.25 cw(c156.5,204) 156.75,204 cw(c156.5,204)
cut-out: 155.5,203.75 cw(c155.5,204) 155.5,204.25 cw(c155.5,204) 155.75,204 cw(c155.5,204)
cut-out: 154.5,203.75 cw(c154.5,204) 154.5,204.25 cw(c154.5,204) 154.75,204 cw(c154.5,204)
cut-out: 153.5,203.75 cw(c153.5,204) 153.5,204.25 cw(c153.5,204) 153.75,204 cw(c153.5,204)
cut-out: 136,204 143,204 143,197 ccw(c144,197) 145,197 145,204 152,204 ccw(c152,205) 153,205 ccw(c152,205) 152,206 136,206 ccw(c136,205)
cut-out: 134.5,203.75 cw(c134.5,204) 134.5,204.25 cw(c134.5,204) 134.75,204 cw(c134.5,204)
cut-out: 133.5,203.75 cw(c133.5,204) 133.5,204.25 cw(c133.5,204) 133.75,204 cw(c133.5,204)
cut-out: 132.5,203.75 cw(c132.5,204) 132.5,204.25 cw(c132.5,204) 132.75,204 cw(c132.5,204)
cut-out: 131.5,203.75 cw(c131.5,204) 131.5,204.25 cw(c131.5,204) 131.75,204 cw(c131.5,204)
cut-out: 26,204 cw(c26,205) 26,206 130,206 cw(c130,205) 131,205 cw(c130,205) 130,204
cut-out: 24.5,203.75 cw(c24.5,204) 24.5,204.25 cw(c24.5,204) 24.75,204 cw(c24.5,204)
cut-out: 23.5,203.75 cw(c23.5,204) 23.5,204.25 cw(c23.5,204) 23.75,204 cw(c23.5,204)
cut-out: 22.5,203.75 cw(c22.5,204) 22.5,204.25 cw(c22.5,204) 22.75,204 cw(c22.5,204)
cut-out: 21.5,203.75 cw(c21.5,204) 21.5,204.25 cw(c21.5,204) 21.75,204 cw(c21.5,204)
cut-out: 2.5,203.75 cw(c2.5,204) 2.5,204.25 cw(c2.5,204) 2.75,204 cw(c2.5,204)
cut-out: 1.5,203.75 cw(c1.5,204) 1.5,204.25 cw(c1.5,204) 1.75,204 cw(c1.5,204)
cut-out: 0.5,203.75 cw(c0.5,204) 0.5,204.25 cw(c0.5,204) 0.75,204 cw(c0.5,204)
cut-out: 4,204 11,204 11,197 ccw(c12,197) 13,197 13,204 20,204 ccw(c20,205) 21,205 ccw(c20,205) 20,206 4,206 ccw(c4,205)

## Design rules (kind name [scope] priority, off if disabled: settings)
Clearance [All] p1: gap=0.254 ignorepadtopadclearanceinfootprint=FALSE except(0: Arc-Hole Track-Hole SMDPad-Hole THPad-Hole Via-Hole Fill-Hole Poly-Hole Region-Hole Text-Hole)
PolygonConnect [All] p1: connectstyle=Relief reliefconductorwidth=0.254 reliefentries=4 polygonreliefangle="90 Angle" airgapwidth=0.254
RoutingVias [All] p1: holewidth=0.711 width=1.27 viastyle="Through Hole" minholewidth=0.711 minwidth=1.27 maxholewidth=0.711 maxwidth=1.27
SolderMaskExpansion [All] p1: expansion=0.102
Width [All] p1: maxlimit=0.254 minlimit=0.2 preferedwidth=0.254
30 further rules are at their usual default settings.

## Components (designator, comment, footprint, x,y, rotation, side; value= is the part's Value field where it differs from the comment)
Designator2 "Comment" FIDUCIAL 10,215 r0 top
Designator3 "Comment" FIDUCIAL 410,215 r0 top
Designator4 "Comment" FIDUCIAL 410,5 r0 top
Designator5 "Comment" FIDUCIAL 10,5 r0 top

## Footprints (in the part's own frame and the unit in brackets; to place one, negate y for a bottom-side part, rotate by r counter-clockwise, add the part's x,y. Pads: shape width x height; smd on the part's side, far side on the other; paste and mask are expansions set on the pad)
FIDUCIAL [mm] "FIDUCIAL Din 1mm Dout 3mm"
  round 1 smd mask+1.2: 1(0,0)
  Top Layer circle w0.2: c0,0 r1.5

## Nets (pads, with @x,y where several pads share a name; then routed paths per layer and width w, separated by ;. In a path a pad name is that pad's centre, name@x,y a point inside that pad or via, vN(x,y) a via of type N, cw(c..) or ccw(c..) an arc to the next point about the centre after c; other vN are vias at no path point)
pads on no net: Designator2.1 Designator3.1 Designator4.1 Designator5.1

## Keep-outs
Keep-Out Layer:
  lines w0.15: 275.999,77 275.999,77 ; 275.999,77 275.999,77 ; 275.999,77 275.999,77 ; 276,15 276,15 ; 276,15 276,15 ; 276,15 276,15 ; 276,79 276,79 ; 276,79 276,79 ; 276,141 276,141 ; 276,141 276,141 ; 276,141 276,141 ; 276,143 276,143 ; 276,143 276,143 ; 276,205 276,205 ; 276,205 276,205 ; 276,205 276,205 ; 143.999,77 143.999,77 ; 144,15 144,15 ; 144,79 144,79 ; 144,141 144,141 ; 144,143 144,143 ; 144,205 144,205 ; 408,79 408,79 ; 408,143 408,143
  lines w0.5: 21.5,80 21.5,80 ; 21.5,80 21.5,80 ; 21.5,144 21.5,144 ; 21.5,144 21.5,144 ; 22.5,80 22.5,80 ; 22.5,80 22.5,80 ; 22.5,144 22.5,144 ; 22.5,144 22.5,144 ; 23.5,80 23.5,80 ; 23.5,80 23.5,80 ; 23.5,144 23.5,144 ; 23.5,144 23.5,144 ; 24.5,80 24.5,80 ; 24.5,80 24.5,80 ; 24.5,144 24.5,144 ; 24.5,144 24.5,144 ; 153.5,80 153.5,80 ; 153.5,80 153.5,80 ; 153.5,144 153.5,144 ; 153.5,144 153.5,144 ; 154.5,80 154.5,80 ; 154.5,80 154.5,80 ; 154.5,144 154.5,144 ; 154.5,144 154.5,144 ; 155.5,80 155.5,80 ; 155.5,80 155.5,80 ; 155.5,144 155.5,144 ; 155.5,144 155.5,144 ; 156.5,80 156.5,80 ; 156.5,80 156.5,80 ; 156.5,144 156.5,144 ; 156.5,144 156.5,144 ; 285.5,80 285.5,80 ; 285.5,80 285.5,80 ; 285.5,144 285.5,144 ; 285.5,144 285.5,144 ; 286.5,80 286.5,80 ; 286.5,80 286.5,80 ; 286.5,144 286.5,144 ; 286.5,144 286.5,144 ; 287.5,80 287.5,80 ; 287.5,80 287.5,80 ; 287.5,144 287.5,144 ; 287.5,144 287.5,144 ; 288.5,80 288.5,80 ; 288.5,80 288.5,80 ; 288.5,144 288.5,144 ; 288.5,144 288.5,144 ; 0.5,16 0.5,16 ; 0.499,76 0.499,76 ; 0.5,140 0.5,140 ; 0.5,204 0.5,204 ; 1.5,16 1.5,16 ; 1.499,76 1.499,76 ; 1.5,140 1.5,140 ; 1.5,204 1.5,204 ; 2.5,16 2.5,16 ; 2.499,76 2.499,76 ; 2.5,140 2.5,140 ; 2.5,204 2.5,204 ; 13,24.5 13,24.5 ; 13,25.5 13,25.5 ; 13,26.5 13,26.5 ; 13,27.5 13,27.5 ; 12.999,64.5 12.999,64.5 ; 12.999,65.5 12.999,65.5 ; 12.999,66.5 12.999,66.5 ; 12.999,67.5 12.999,67.5 ; 13,88.5 13,88.5 ; 13,89.5 13,89.5 ; 13,90.5 13,90.5 ; 13,91.5 13,91.5 ; 13,128.5 13,128.5 ; 13,129.5 13,129.5 ; 13,130.5 13,130.5 ; 13,131.5 13,131.5 ; 13,152.5 13,152.5 ; 13,153.5 13,153.5 ; 13,154.5 13,154.5 ; 13,155.5 13,155.5 ; 13,192.5 13,192.5 ; 13,193.5 13,193.5 ; 13,194.5 13,194.5 ; 13,195.5 13,195.5 ; 21.5,16 21.5,16 ; 21.499,76 21.499,76 ; 21.5,140 21.5,140 ; 21.5,204 21.5,204 ; 22.5,16 22.5,16 ; 22.499,76 22.499,76 ; 22.5,140 22.5,140 ; 22.5,204 22.5,204 ; 23.499,76 23.499,76 ; 23.5,16 23.5,16 ; 23.5,140 23.5,140 ; 23.5,204 23.5,204 ; 24.5,16 24.5,16 ; 24.499,76 24.499,76 ; 24.5,140 24.5,140 ; 24.5,204 24.5,204 ; 131.5,16 131.5,16 ; 131.499,76 131.499,76 ; 131.5,80 131.5,80 ; 131.5,140 131.5,140 ; 131.5,144 131.5,144 ; 131.5,204 131.5,204 ; 132.5,16 132.5,16 ; 132.499,76 132.499,76 ; 132.5,80 132.5,80 ; 132.5,140 132.5,140 ; 132.5,144 132.5,144 ; 132.5,204 132.5,204 ; 133.5,16 133.5,16 ; 133.499,76 133.499,76 ; 133.5,80 133.5,80 ; 133.5,140 133.5,140 ; 133.5,144 133.5,144 ; 133.5,204 133.5,204 ; 134.5,16 134.5,16 ; 134.499,76 134.499,76 ; 134.5,80 134.5,80 ; 134.5,140 134.5,140 ; 134.5,144 134.5,144 ; 134.5,204 134.5,204 ; 143,24.5 143,24.5 ; 143,25.5 143,25.5 ; 143,26.5 143,26.5 ; 143,27.5 143,27.5 ; 142.999,64.5 142.999,64.5 ; 142.999,65.5 142.999,65.5 ; 142.999,66.5 142.999,66.5 ; 142.999,67.5 142.999,67.5 ; 143,88.5 143,88.5 ; 143,89.5 143,89.5 ; 143,90.5 143,90.5 ; 143,91.5 143,91.5 ; 143,128.5 143,128.5 ; 143,129.5 143,129.5 ; 143,130.5 143,130.5 ; 143,131.5 143,131.5 ; 143,152.5 143,152.5 ; 143,153.5 143,153.5 ; 143,154.5 143,154.5 ; 143,155.5 143,155.5 ; 143,192.5 143,192.5 ; 143,193.5 143,193.5 ; 143,194.5 143,194.5 ; 143,195.5 143,195.5 ; 145,24.5 145,24.5 ; 145,25.5 145,25.5 ; 145,26.5 145,26.5 ; 145,27.5 145,27.5 ; 144.999,64.5 144.999,64.5 ; 144.999,65.5 144.999,65.5 ; 144.999,66.5 144.999,66.5 ; 144.999,67.5 144.999,67.5 ; 145,88.5 145,88.5 ; 145,89.5 145,89.5 ; 145,90.5 145,90.5 ; 145,91.5 145,91.5 ; 145,128.5 145,128.5 ; 145,129.5 145,129.5 ; 145,130.5 145,130.5 ; 145,131.5 145,131.5 ; 145,152.5 145,152.5 ; 145,153.5 145,153.5 ; 145,154.5 145,154.5 ; 145,155.5 145,155.5 ; 145,192.5 145,192.5 ; 145,193.5 145,193.5 ; 145,194.5 145,194.5 ; 145,195.5 145,195.5 ; 153.5,16 153.5,16 ; 153.499,76 153.499,76 ; 153.5,140 153.5,140 ; 153.5,204 153.5,204 ; 154.5,16 154.5,16 ; 154.499,76 154.499,76 ; 154.5,140 154.5,140 ; 154.5,204 154.5,204 ; 155.499,76 155.499,76 ; 155.5,16 155.5,16 ; 155.5,140 155.5,140 ; 155.5,204 155.5,204 ; 156.5,16 156.5,16 ; 156.499,76 156.499,76 ; 156.5,140 156.5,140 ; 156.5,204 156.5,204 ; 263.5,16 263.5,16 ; 263.499,76 263.499,76 ; 263.5,80 263.5,80 ; 263.5,140 263.5,140 ; 263.5,144 263.5,144 ; 263.5,204 263.5,204 ; 264.5,16 264.5,16 ; 264.499,76 264.499,76 ; 264.5,80 264.5,80 ; 264.5,140 264.5,140 ; 264.5,144 264.5,144 ; 264.5,204 264.5,204 ; 265.5,16 265.5,16 ; 265.499,76 265.499,76 ; 265.5,80 265.5,80 ; 265.5,140 265.5,140 ; 265.5,144 265.5,144 ; 265.5,204 265.5,204 ; 266.5,16 266.5,16 ; 266.499,76 266.499,76 ; 266.5,80 266.5,80 ; 266.5,140 266.5,140 ; 266.5,144 266.5,144 ; 266.5,204 266.5,204 ; 275,24.5 275,24.5 ; 275,25.5 275,25.5 ; 275,26.5 275,26.5 ; 275,27.5 275,27.5 ; 274.999,64.5 274.999,64.5 ; 274.999,65.5 274.999,65.5 ; 274.999,66.5 274.999,66.5 ; 274.999,67.5 274.999,67.5 ; 275,88.5 275,88.5 ; 275,89.5 275,89.5 ; 275,90.5 275,90.5 ; 275,91.5 275,91.5 ; 275,128.5 275,128.5 ; 275,129.5 275,129.5 ; 275,130.5 275,130.5 ; 275,131.5 275,131.5 ; 275,152.5 275,152.5 ; 275,153.5 275,153.5 ; 275,154.5 275,154.5 ; 275,155.5 275,155.5 ; 275,192.5 275,192.5 ; 275,193.5 275,193.5 ; 275,194.5 275,194.5 ; 275,195.5 275,195.5 ; 277,24.5 277,24.5 ; 277,25.5 277,25.5 ; 277,26.5 277,26.5 ; 277,27.5 277,27.5 ; 276.999,64.5 276.999,64.5 ; 276.999,65.5 276.999,65.5 ; 276.999,66.5 276.999,66.5 ; 276.999,67.5 276.999,67.5 ; 277,88.5 277,88.5 ; 277,89.5 277,89.5 ; 277,90.5 277,90.5 ; 277,91.5 277,91.5 ; 277,128.5 277,128.5 ; 277,129.5 277,129.5 ; 277,130.5 277,130.5 ; 277,131.5 277,131.5 ; 277,152.5 277,152.5 ; 277,153.5 277,153.5 ; 277,154.5 277,154.5 ; 277,155.5 277,155.5 ; 277,192.5 277,192.5 ; 277,193.5 277,193.5 ; 277,194.5 277,194.5 ; 277,195.5 277,195.5 ; 285.5,16 285.5,16 ; 285.499,76 285.499,76 ; 285.5,140 285.5,140 ; 285.5,204 285.5,204 ; 286.5,16 286.5,16 ; 286.499,76 286.499,76 ; 286.5,140 286.5,140 ; 286.5,204 286.5,204 ; 287.499,76 287.499,76 ; 287.5,16 287.5,16 ; 287.5,140 287.5,140 ; 287.5,204 287.5,204 ; 288.5,16 288.5,16 ; 288.499,76 288.499,76 ; 288.5,140 288.5,140 ; 288.5,204 288.5,204 ; 395.5,16 395.5,16 ; 395.499,76 395.499,76 ; 395.5,80 395.5,80 ; 395.5,140 395.5,140 ; 395.5,144 395.5,144 ; 395.5,204 395.5,204 ; 396.5,16 396.5,16 ; 396.499,76 396.499,76 ; 396.5,80 396.5,80 ; 396.5,140 396.5,140 ; 396.5,144 396.5,144 ; 396.5,204 396.5,204 ; 397.5,16 397.5,16 ; 397.499,76 397.499,76 ; 397.5,80 397.5,80 ; 397.5,140 397.5,140 ; 397.5,144 397.5,144 ; 397.5,204 397.5,204 ; 398.5,16 398.5,16 ; 398.499,76 398.499,76 ; 398.5,80 398.5,80 ; 398.5,140 398.5,140 ; 398.5,144 398.5,144 ; 398.5,204 398.5,204 ; 407,24.5 407,24.5 ; 407,25.5 407,25.5 ; 407,26.5 407,26.5 ; 407,27.5 407,27.5 ; 406.999,64.5 406.999,64.5 ; 406.999,65.5 406.999,65.5 ; 406.999,66.5 406.999,66.5 ; 406.999,67.5 406.999,67.5 ; 407,88.5 407,88.5 ; 407,89.5 407,89.5 ; 407,90.5 407,90.5 ; 407,91.5 407,91.5 ; 407,128.5 407,128.5 ; 407,129.5 407,129.5 ; 407,130.5 407,130.5 ; 407,131.5 407,131.5 ; 407,152.5 407,152.5 ; 407,153.5 407,153.5 ; 407,154.5 407,154.5 ; 407,155.5 407,155.5 ; 407,192.5 407,192.5 ; 407,193.5 407,193.5 ; 407,194.5 407,194.5 ; 407,195.5 407,195.5 ; 417.5,16 417.5,16 ; 417.499,76 417.499,76 ; 417.5,140 417.5,140 ; 417.5,204 417.5,204 ; 418.5,16 418.5,16 ; 418.499,76 418.499,76 ; 418.5,140 418.5,140 ; 418.5,204 418.5,204 ; 419.499,76 419.499,76 ; 419.5,16 419.5,16 ; 419.5,140 419.5,140 ; 419.5,204 419.5,204
  lines w2: 4,15 12,15 ; 3.999,77 11.999,77 ; 4,141 12,141 ; 4,205 12,205 ; 11.999,69 11.999,77 ; 12,23 12,15 ; 12,29 12,63 ; 12,77 12,78.999 ; 12,87 12,79 ; 12,93 12,127 ; 12,133 12,141 ; 12,151 12,143 ; 12,157 12,191 ; 12,197 12,205 ; 19.999,79 19.999,77 11.999,77 ; 20,15 12,15 ; 20,79 12,79 ; 20,205 12,205 ; 26,15 130,15 ; 26,205 130,205 ; 129.999,77 25.999,77 25.999,78.999 130,79 ; 130,141 26,141 26,143 130,143 ; 136,15 144,15 ; 136,141 144,141 ; 136,141 136,143 144,143 ; 136,205 144,205 ; 143.999,69 143.999,77 ; 144,23 144,15 ; 144,29 144,63 ; 144,87 144,79 ; 144,93 144,127 ; 144,133 144,141 ; 144,151 144,143 ; 144,157 144,191 ; 144,197 144,205 ; 151.999,78.999 151.999,77 143.999,77 ; 152,15 144,15 ; 152,79 144,79 ; 152,205 144,205 ; 158,15 262,15 ; 158,205 262,205 ; 261.999,77 157.999,77 157.999,78.999 262,79 ; 262,141 158,141 158,143 262,143 ; 268,15 276,15 ; 268,143 268,141 276,141 ; 268,143 276,143 ; 268,205 276,205 ; 275.999,69 275.999,77 ; 276,23 276,15 ; 276,29 276,63 ; 276,87 276,79 ; 276,93 276,127 ; 276,133 276,141 ; 276,151 276,143 ; 276,157 276,191 ; 276,197 276,205 ; 283.999,77 275.999,77 ; 284,15 276,15 ; 284,77 284,78.999 276,79 ; 284,205 276,205 ; 290,15 394,15 ; 290,205 394,205 ; 393.999,77 289.999,77 290,78.999 394,79 ; 394,141 290,141 290,143 394,143 ; 400,15 408,15 ; 400,143 400,141 408,141 ; 400,143 408,143 ; 400,205 408,205 ; 407.999,69 407.999,77 ; 408,23 408,15 ; 408,29 408,63 ; 408,77 408,78.999 ; 408,87 408,79 ; 408,93 408,127 ; 408,133 408,141 ; 408,151 408,143 ; 408,157 408,191 ; 408,197 408,205 ; 415.999,77 407.999,77 ; 416,15 408,15 ; 416,141 408,141 ; 416,205 408,205 ; 12,141 12,143 ; 12,141 20,141 20,143 12,143 ; 143.999,77 135.999,77 136,78.999 144,79 ; 144,141 152,141 152,143 144,143 ; 275.999,77 267.999,77 267.999,78.999 276,79 ; 276,141 284,141 284,143 276,143 ; 407.999,77 399.999,77 399.999,78.999 408,79 ; 408,141 408,143

## Silkscreen, mask and mechanical layers (free items; w line width, h text height)
Top Overlay:
  lines w0.15: 0,10 420,10 ; 0,210 420,210
Mechanical 1:
  the board outline again, w0.15

## Panel: embedded boards
"POETIC_AD_Input_V2.PcbDoc" at 13,204, 3 rows x 3 columns, spacing 132 x 64, rotation 270